# Altium PCB PCB1.PcbDoc
Units mil, origin at the board's own origin, x right, y up, seen from the top; angles counter-clockwise.
Board outline 2870 x 3555 mil, 2 copper layers (Top Layer, Bottom Layer); 34 components, 40 nets, 149 pads, 8 vias.
Unrouted connection lines stored in the file: 1.
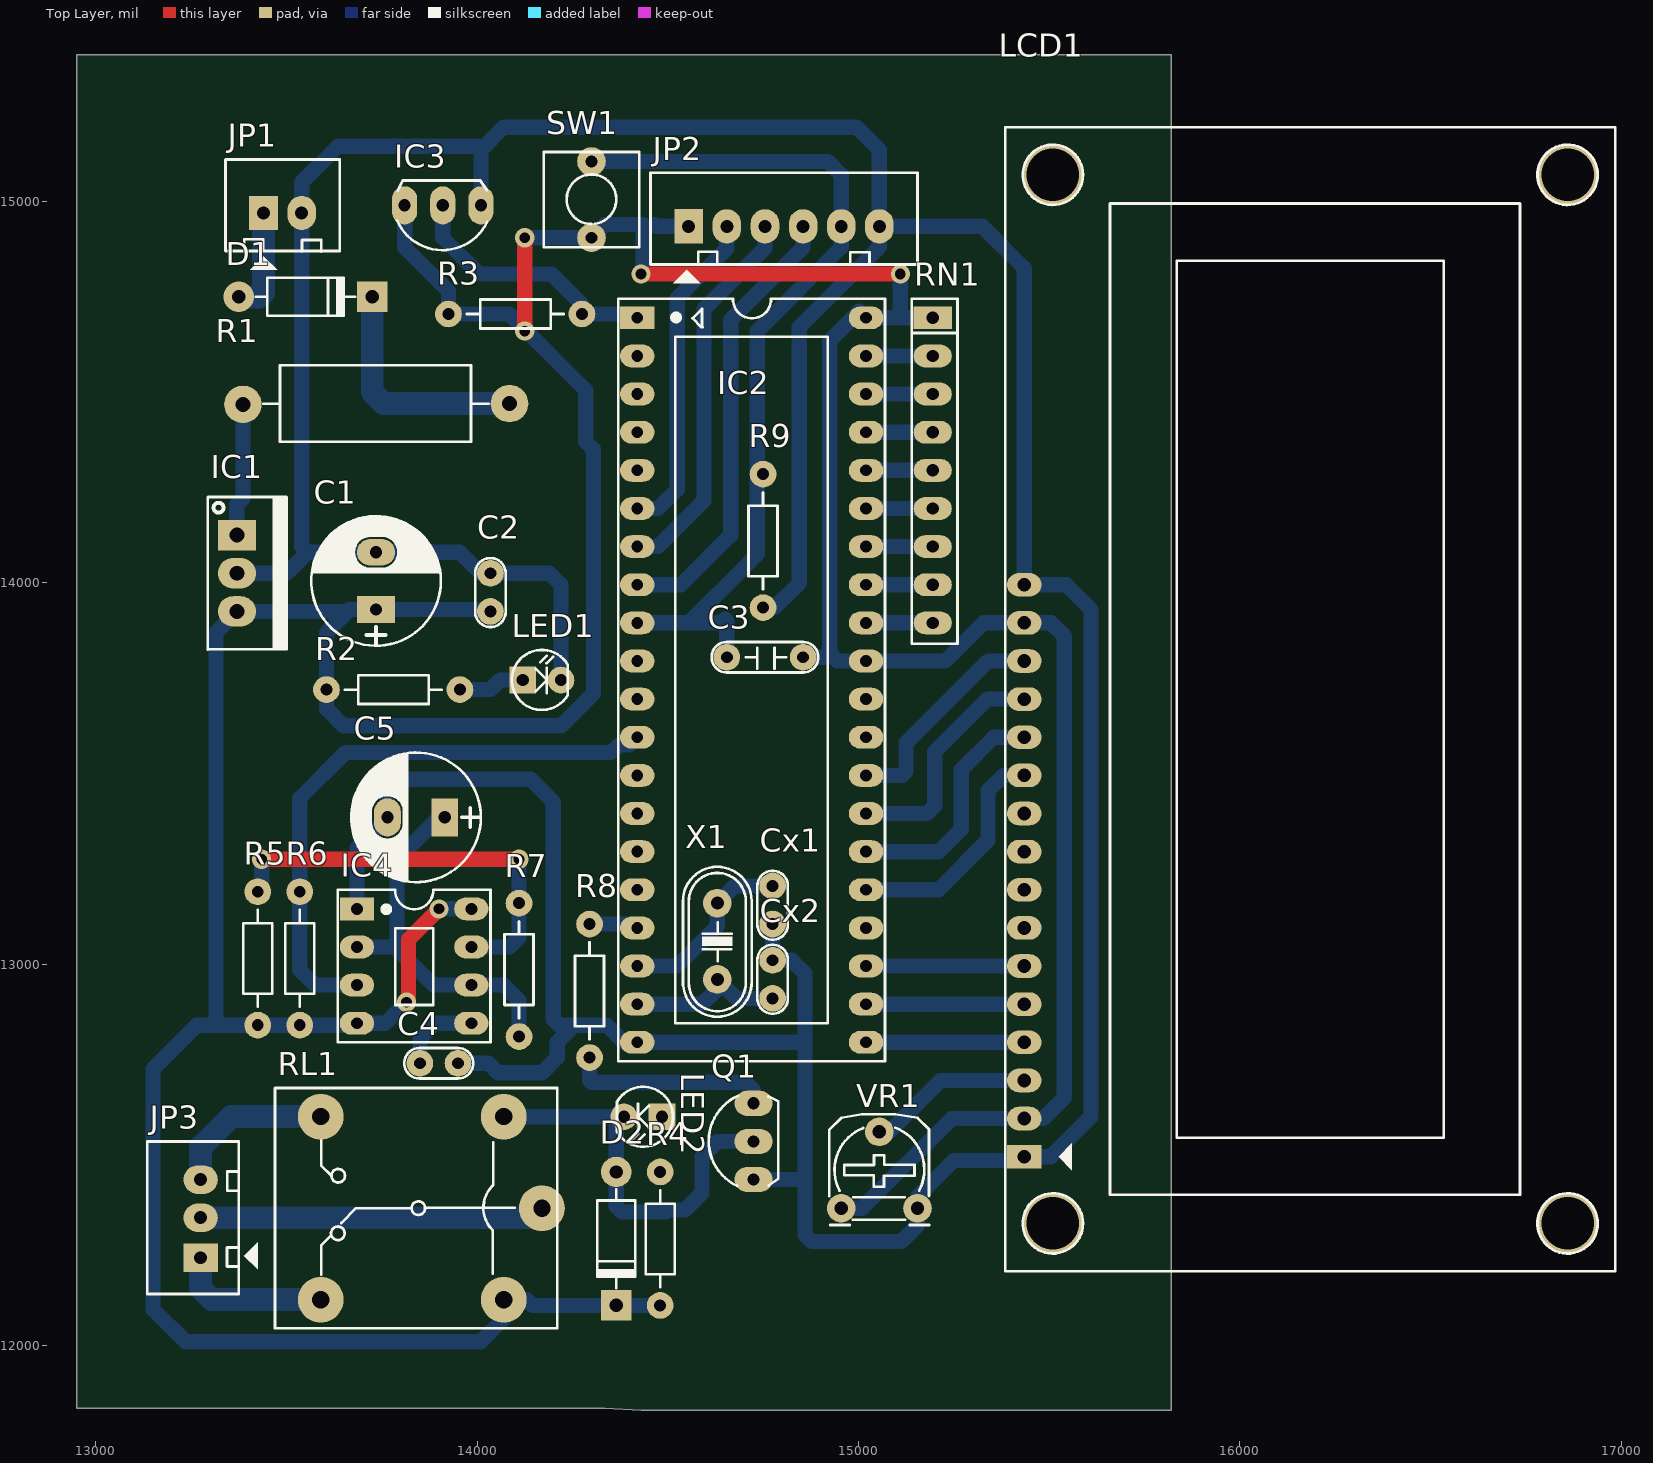
[diagram p0: Top Layer view]
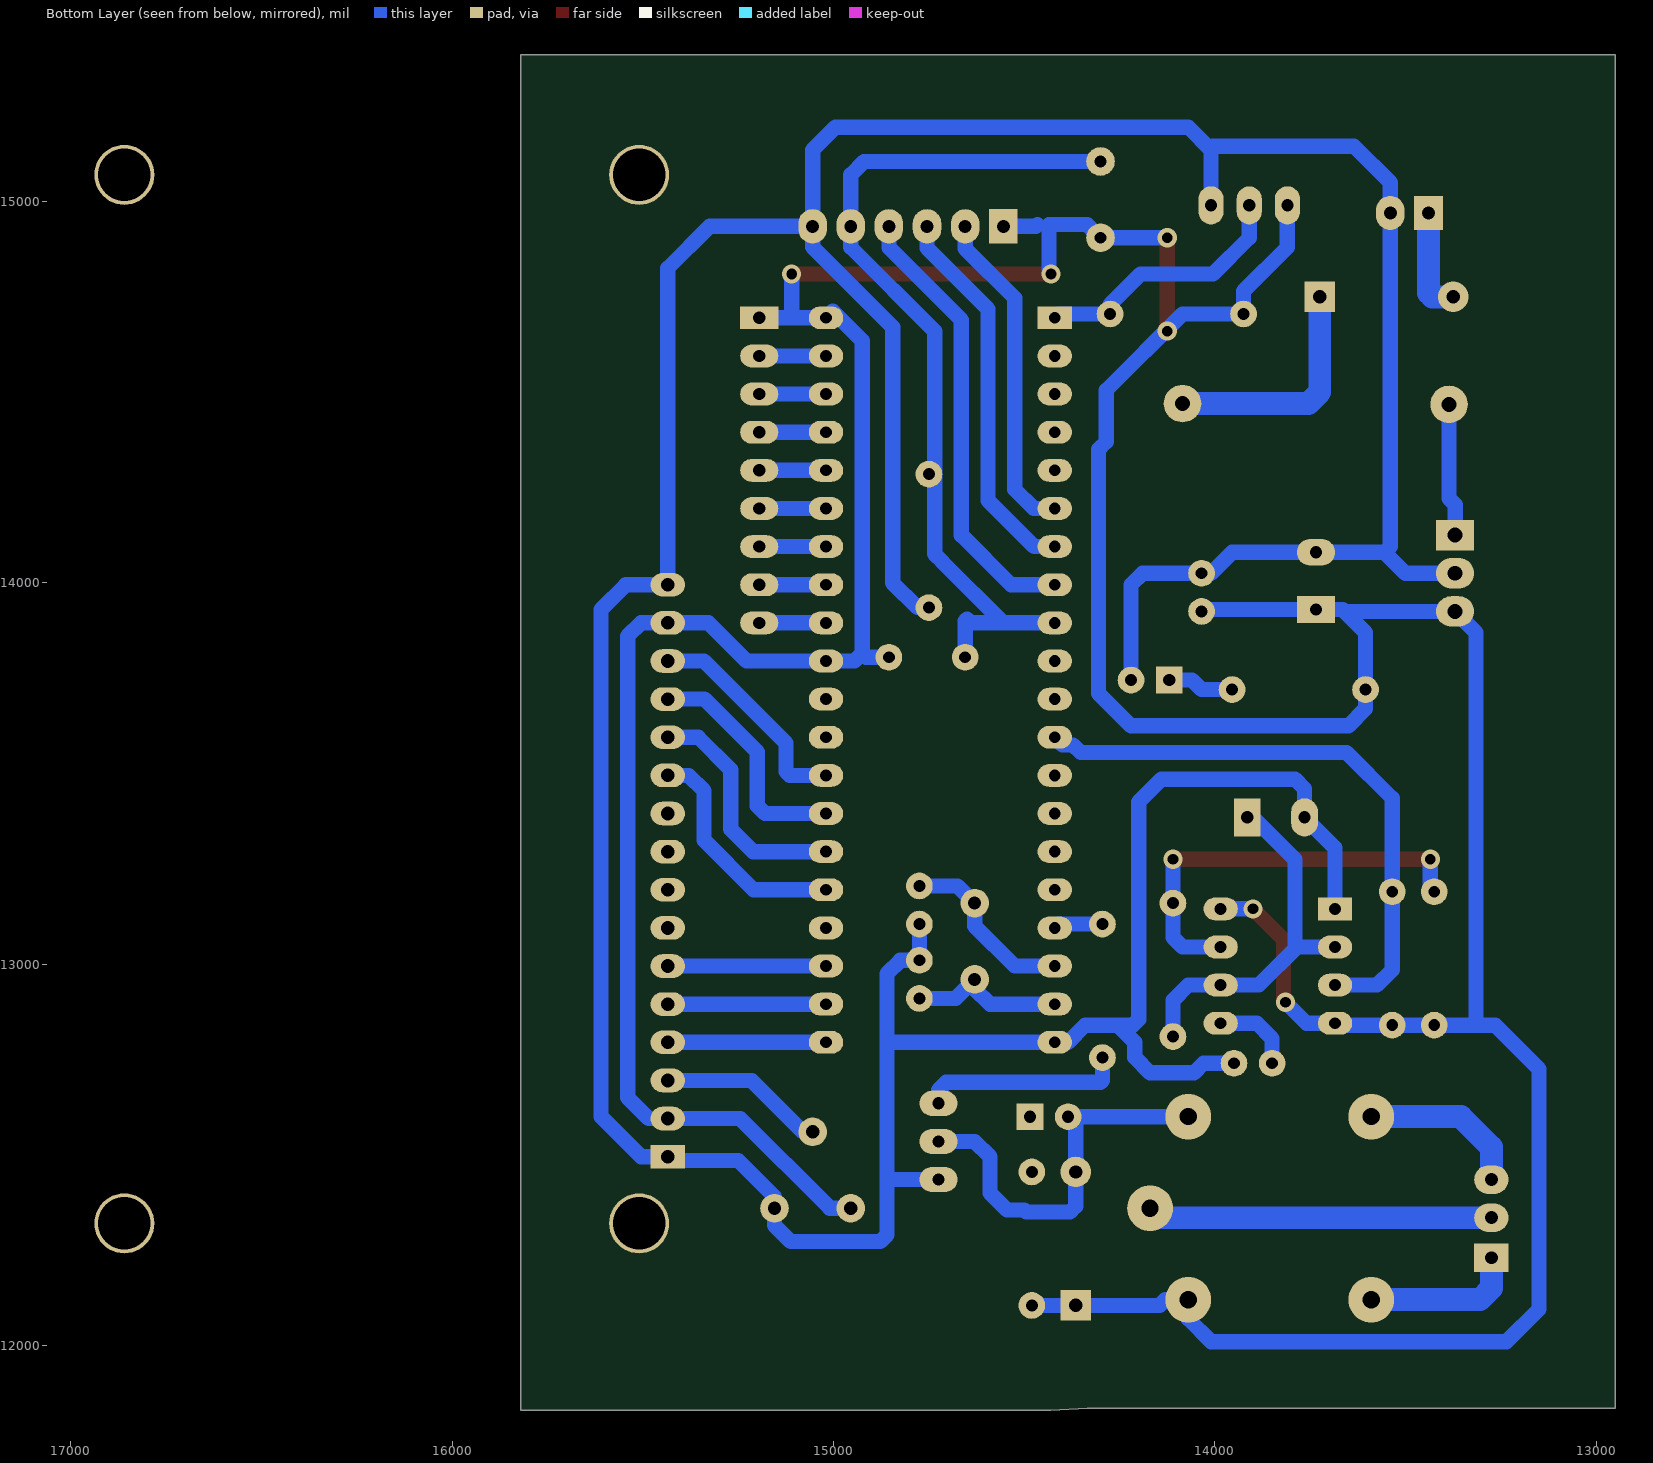
[diagram p1: Bottom Layer view, seen from below]
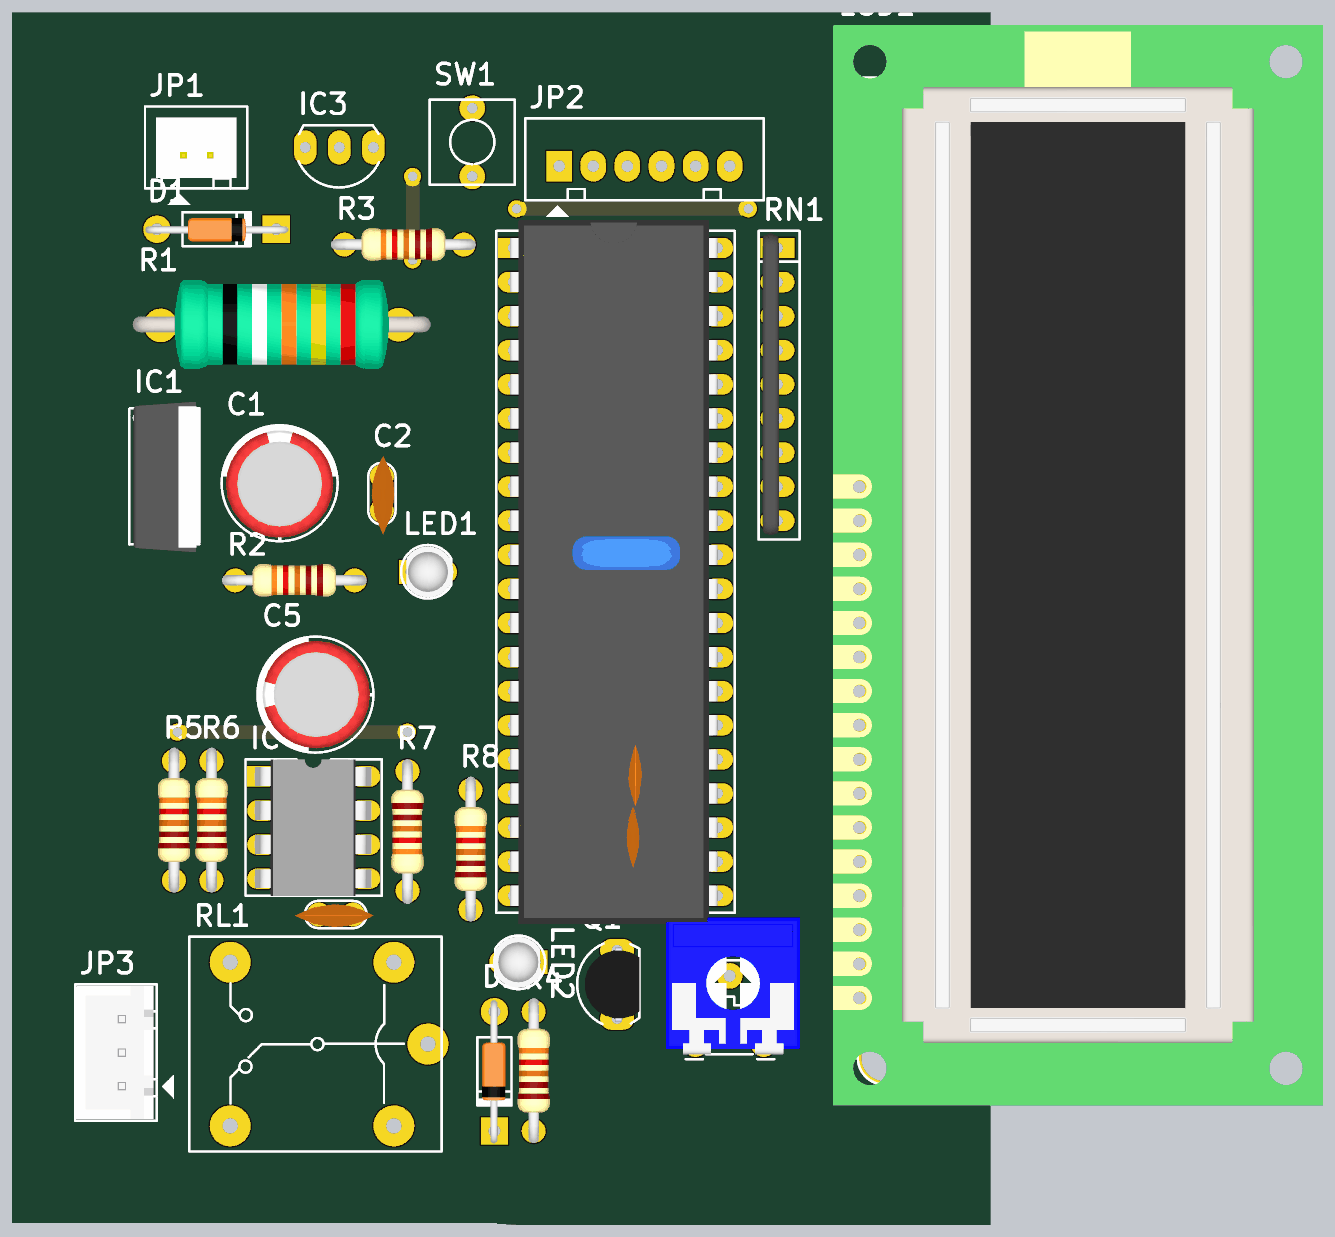
[diagram p2: 3D render of the assembled board from above, using the file's embedded part models]

## Layer stack, top to bottom
Top Solder: solder mask 0.4, Solder Resist, Dk 3.5
Top Layer: signal copper 1.4
Dielectric1: dielectric 12.6, FR-4, Dk 4.8
Bottom Layer: signal copper 1.4
Bottom Solder: solder mask 0.4, Solder Resist, Dk 3.5

## Board outline
14430,11830 15820,11830 15820,14640 15820,15385 14625,15385 12950,15385 12950,12825 12950,11835 14335,11835

## Design rules (kind name [scope] priority, off if disabled: settings)
Clearance [All] p1: gap=30
ComponentClearance [All] p1 off: gap=10 collisioncheckmode=3 verticalgap=10 showdistances=FALSE
MinimumSolderMaskSliver [All] p1 off: minsoldermaskwidth=10
PolygonConnect [All] p1: connectstyle=Relief reliefconductorwidth=10 reliefentries=4 polygonreliefangle="90 Angle" airgapwidth=10
RoutingVias [All] p1: holewidth=28 width=50 viastyle="Through Hole" minholewidth=28 minwidth=50 maxholewidth=28 maxwidth=50
SilkToSilkClearance [All] p1 off: silktosilkclearance=10
SilkToSolderMaskClearance SilkscreenOverComponentPads [IsPad] p1 off: minsilkscreentomaskgap=10 clearancetoexposedcopper=TRUE
SolderMaskExpansion [All] p1: expansion=4
Width [All] p1: maxlimit=60 minlimit=20 preferedwidth=40
26 further rules are at their usual default settings.

## Components (designator, comment, footprint, x,y, rotation, side; value= is the part's Value field where it differs from the comment)
C1 "1000uF" CP1.5/3.4 13735,13930 r90 top
C2 "100pF" CN1 14035,14025 r270 top
C3 "10uF" CN2 14855,13805 r180 top
C4 "104" CN1 13950,12740 r180 top
C5 "HS1101" CP1.5/3.4 13915,13385 r180 top
Cx1 "33pF" CN1 14775,13205 r270 top
Cx2 "33pF" CN1 14775,12910 r90 top
D1 "1N4007" D1A 13375,14750 r180 top
D2 "1N4007" D1A 14365,12455 r90 top
IC1 "LM7805" QTO-220 13370,14125 r270 top
IC2 "AT89C52" DIP40/W0.6 14420,14695 r270 top
IC3 "DS18S20" DS18S20 13910,14990 r180 top
IC4 "LM555" DIP8/W0.3 13685,13145 r270 top
JP1 "JP2" CON2 13440,14970 r0 top
JP2 "JP6" CON6 14555,14935 r0 top
JP3 "JP3" CON3 13275,12235 r90 top
LCD1 "LCD 16x2A" LCD16X2 15435,12495 r90 top
LED1 "LED" LED-3 14120,13745 r0 top
LED2 "LED" LED-3 14485,12600 r180 top
Q1 "C1815" QTO-92 14725,12535 r90 top
R1 "2.2/2W" R2W 14085,14470 r180 top
R2 "330" R1/4W 13605,13720 r0 top
R3 "1k" R1/4W 13925,14705 r0 top
R4 "1k" R1/4W 14480,12455 r270 top
R5 "1k" R1/4W 13425,13190 r270 top
R6 "1k" R1/4W 13535,13190 r270 top
R7 "1k" R1/4W 14110,12810 r90 top
R8 "1k" R1/4W 14295,13105 r270 top
R9 "1k" R1/4W 14750,14285 r270 top
RL1 "Relay 10A/12V" RL_SPDT_10A 14170,12360 r180 top
RN1 "10K" RN8 15195,14695 r270 top
SW1 "SW" SW2 14300,15105 r270 top
VR1 "10K" VR 14955,12360 r0 top
X1 "4Mhz" XT2 14630,13060 r90 top

## Footprints (in the part's own frame and the unit in brackets; to place one, negate y for a bottom-side part, rotate by r counter-clockwise, add the part's x,y. Pads: shape width x height; smd on the part's side, far side on the other; paste and mask are expansions set on the pad)
CN1 [mil]
  round 70 hole 31: 1(0,0) 2(100,0)
  silkscreen extent -40,-40 141,40, body extent -60,-30 170,37, height 265
CN2 [mil]
  round 70 hole 31: 1(0,0) 2(200,0)
  silkscreen extent -40,-40 240,40, body extent -54,-44 260,55, height 407
CON2 [mil] "CON2"
  rect 75x90 hole 34: 1(0,0)
  oval 75x90 hole 34: 2(100,0)
  silkscreen extent -100,-150 200,140, body extent -68,-70 168,107, height 236
CON3 [mil] "CON 3"
  rect 75x90 hole 34: 1(-5,0)
  oval 75x90 hole 34: 2(100,0) 3(200,0)
  silkscreen extent -100,-150 300,140, body extent -95,-90 295,136, height 276
CON6 [mil] "CON6"
  rect 75x90 hole 34: 1(0,0)
  oval 75x90 hole 34: 2(100,0) 3(200,0) 4(300,0) 5(400,0) 6(500,0)
  silkscreen extent -100,-150 600,140
CP1.5/3.4 [mil] "Tu hoa 220->470uF,16V, 470uF/16V,25V"
  rect 70x100 hole 32: 1(0,0)
  oval 70x100 hole 32: 2(150,0)
  silkscreen extent -95,-170 245,170, body extent -85,-157 230,157, height 446
D1A [mil] "Diode 1A, W 100mil, L 350mil"
  round 80 hole 35: 1(0,0)
  rect 80x80 hole 35: 2(-350,0)
  silkscreen extent -305,-50 -45,50, body extent -386,-33 34,36, height 84
DIP8/W0.3 [mil] "8 PIN, W 300mil, Pin to pin 100mil"
  rect 60x90 hole 31: 1(0,0)
  oval 60x90 hole 31: 2(100,0) 3(200,0) 4(300,0) 5(300,300) 6(200,300) 7(100,300) 8(0,300)
  silkscreen extent -50,-50 350,350, body extent -50,-40 350,336, height 201
DIP40/W0.6 [mil] "40 PIN, W 600mil, Pin to pin 100mil"
  rect 60x90 hole 31: 1(0,0)
  oval 60x90 hole 31: 2(100,0) 3(200,0) 4(300,0) 5(400,0) 6(500,0) 7(600,0) 8(700,0) 9(800,0) 10(900,0) 11(1000,0) 12(1100,0) 13(1200,0) 14(1300,0) 15(1400,0) 16(1500,0) 17(1600,0) 18(1700,0) 19(1800,0) 20(1900,0) 21(1900,600) 22(1800,600) 23(1700,600) 24(1600,600) 25(1500,600) 26(1400,600) 27(1300,600) 28(1200,600) 29(1100,600) 30(1000,600) 31(900,600) 32(800,600) 33(700,600) 34(600,600) 35(500,600) 36(400,600) 37(300,600) 38(200,600) 39(100,600) 40(0,600)
  silkscreen extent -50,-50 1950,650, body extent -82,-10 1982,600, height 224
DS18S20 [mil] "TO-92"
  oval 66x100 hole 32: 3(100,0) 4(0,0) 5(-100,0)
  silkscreen extent -117,-65 120,118
LCD16X2 [mil] "LCD dipslay 16x2, 16 pin"
  rect 62x90 hole 36: 1(0,0)
  oval 62x90 hole 36: 2(100,0) 3(200,0) 4(300,0) 5(400,0) 6(500,0) 7(600,0) 8(700,0) 9(800,0) 10(900,0) 11(1000,0) 12(1100,0) 13(1200,0) 14(1300,0) 15(1400,0) 16(1500,0)
  round 157.48 hole 137.8: "Hole 0"(-175,-75) "Hole 0"(-175,-1425) "Hole 0"(2575,-1425) "Hole 0"(2575,-75)
  silkscreen extent -300,-1550 2700,50, body extent -315,-1360 2855,77, height 414
LED-3 [mil] "LED 2 PIN, 3ly Only colour"
  rect 70x70 hole 32: 1(0,0)
  round 70 hole 32: 2(100,0)
  silkscreen extent -29,-78 118,79, body extent -13,-75 125,75, height 217
QTO-92 [mil] "TO-92"
  oval 66x100 hole 32: 1(-100,0) 2(0,0) 3(100,0)
  silkscreen extent -117,-65 120,118, body extent -109,-66 109,95, height 245
QTO-220 [mil] "TO-220 - 1-2-3"
  rect 80x100 hole 39: 1(0,0)
  oval 80x100 hole 39: 2(100,0) 3(200,0)
  silkscreen extent -100,-76 300,130, body extent -119,-64 322,121, height 755
R1/4W [mil] "R 1/4W, 2 Pin, 350mil"
  round 70 hole 31: 1(0,0) 2(350,0)
  silkscreen extent 48,-38 302,38, body extent -40,-47 386,47, height 111
R2W [mm] "R2W, 2 pin, 700mil"
  round 2.5 hole 1: 1(0,0) 2(17.755,0.051)
  silkscreen extent 1.37,-2.57 16.38,2.54, body extent -2.36,-3.33 19.84,3.27, height 8.3
RL_SPDT_10A [mil] "Relay SPDT, 5 pin, 10A,W 650mil, L 800mil, H 800mil"
  round 120 hole 45: 1(0,0) 2(580,240) 3(580,-240) 4(100,-240) 5(100,240)
  silkscreen extent -40,-315 700,315
RN8 [mil] "R SIP8, 9 Pin"
  rect 60x100 hole 32: 1(0,0)
  oval 60x100 hole 32: 2(100,0) 3(200,0) 4(300,0) 5(400,0) 6(500,0) 7(600,0) 8(700,0) 9(800,0)
  silkscreen extent -50,-55 855,65, body extent -43,-44 843,5, height 259
SW2 [mil] "SW button 2pin, 250x 250 mil"
  round 75 hole 31: 1(0,0) 2(200,0)
  silkscreen extent -25,-125 225,125
VR [mil] "Resistor Variable"
  round 75 hole 35: 1(0,0) 2(100,200) 3(200,0)
  silkscreen extent -31,-44 231,246, body extent -87,-30 307,372, height 165
XT2 [mil] "Footpin for Crystal 2 pin"
  round 75 hole 34: 1(-100,0) 2(100,0)
  silkscreen extent -198,-90 195,90, body extent -233,-93 213,90, height 138

## Part data
C1 C5: library part CP4, "Cap 1000uF/16V - 220uF/50V"
C2 C3 C4: library part CN1, "Cap np  1pF - 472pF"
Cx1 Cx2: library part CN0, "Cremic For Xtal 1pF => 100pF"
D1 D2: library part D1A, "Diode 1A"
IC1: library part LM78xx, "On ap +, from + 5 to + 24VDC"
IC2: "Atmel AT89C52, 8k Byte Flash Memory , 40 Pin"
IC3: "High Precision  1-Wire® Digital Thermometer"
IC4: "Timer"
JP1: library part Con2, "Connector 2"
JP2: library part Con6, "Connector 6"
JP3: library part Con3, "Connector 3"
LCD1: library part LCD16x2A, "LCD dipslay 16 char, 2 line"
LED1 LED2: "LED Single colour Green and Red"
Q1: "NPN 600mW, ECB"
R1: library part R2W, "Resistor 2W"
R2 R3 R4 R5 R6 R7 R8 R9: library part R1/4W, "Resistor 1/4W"
RL1: library part "Relay 1", "Relay SPDT,10A - 12VDC 5 Pin"
RN1: library part RN8, "Resistor 8 (Thanh)"
SW1: library part SW2, "Switch button 2 pin"
VR1: library part VR, "Var Resistor"
X1: library part XT2, "Crystal For all Crystal 2pin."

## Via types
v1: diameter 50, hole 28, Top Layer to Bottom Layer, 8 vias

## Nets (pads, with @x,y where several pads share a name; then routed paths per layer and width w, separated by ;. In a path a pad name is that pad's centre, name@x,y a point inside that pad or via, vN(x,y) a via of type N, cw(c..) or ccw(c..) an arc to the next point about the centre after c; other vN are vias at no path point)
D4: IC2.25 LCD1.11 | length 615.4
  Bottom Layer w40: IC2.25 15210,13195 15340,13325 15340,13455 15380,13495 LCD1.11
D5: IC2.26 LCD1.12 | length 630.6
  Bottom Layer w40: IC2.26 15211.01,13295 15270,13353.99 15270,13510 15355,13595 LCD1.12
D6: IC2.27 LCD1.13 | length 621.9
  Bottom Layer w40: IC2.27 15180,13395 15200,13415 15200,13556.01 15338.99,13695 LCD1.13
D7: IC2.28 LCD1.14 | length 583.2
  Bottom Layer w40: IC2.28 15115,13495 15125,13505 15125,13580 15340,13795 LCD1.14
EN: IC2.23 LCD1.6 | length 415
  Bottom Layer w40: IC2.23 LCD1.6
GND: C1.2 C2.1 C4.1 C5.2 Cx1.2 Cx2.2 IC1.2 IC2.20 IC3.5 IC4.1 JP1.2 JP2.6 LCD1.1 LCD1.16 LED1.2 Q1.1 R9.2 VR1.3 | length 12451
  Bottom Layer w40: IC1.2 13500,14025 13555,14080 ; IC4.1 13685,13305 C5.2 13765,13460 13790,13485 14140,13485 14200,13425 14200,12855 14215,12840 14255,12840 ; C4.1 14030,12740 14055,12715 14170,12715 14210,12755 14210,12795 14255,12840 ; IC3.5 14010,15140 14005,15145 13635,15145 13540,15050 JP1.2 13540,14095 13555,14080 ; 14010,15135 14070,15195 14995,15195 15055,15135 JP2.6 ; LED1.2 14220,13995 14190,14025 14045,14025 14035,14035 C2.1 14010,14025 13955,14080 C1.2 13555,14080 ; Q1.1 14860,12435 ; R9.2 14780,13935 14845,14000 14845,14671.01 15055,14881.01 JP2.6 ; Cx1.2 Cx2.2 14825,13010 14860,12975 14860,12795 ; 14255,12840 14340,12840 14385,12795 IC2.20 14860,12795 ; 14860,12795 14860,12290 14877.5,12272.5 15112.5,12272.5 15155,12315 VR1.3 15155,12390 15250,12485 15425,12485 LCD1.1 15505,12495 15610,12600 15610,13930 15545,13995 LCD1.16 15435,14825 15325,14935 JP2.6
HVCC: D1.1 JP1.1 | length 279.1
  Bottom Layer w60: D1.1 13430,14750 13440,14760 JP1.1
MISO: IC2.7 JP2.3 | length 1010.4
  Bottom Layer w40: IC2.7 14473.99,14095 14595,14216.01 14595,14717.99 14755,14877.99 JP2.3
MOSI: IC2.6 JP2.2 | length 869.6
  Bottom Layer w40: IC2.6 14475,14195 14525,14245 14525,14746.98 14655,14876.98 JP2.2
NetC4_2: C4.2 IC4.5 | length 216.6
  Bottom Layer w40: C4.2 13850,12805 13890,12845 IC4.5
NetC5_1: C5.1 IC4.2 IC4.6 R7.1 | length 980.7
  Bottom Layer w40: IC4.2 13785,13045 ; C5.1 13900,13385 13850,13335 13850,13334.79 13800.21,13285 13800,13285 13790,13275 13790,13050 13785,13045 ; R7.1 14110,12905 14070,12945 IC4.6 13885,12945 13785,13045
NetCx1_1: Cx1.1 IC2.18 X1.2 | length 477.1
  Bottom Layer w40: IC2.18 14525,12995 14630,13100 X1.2 14675,13205 Cx1.1
NetCx2_1: Cx2.1 IC2.19 X1.1 | length 417.3
  Bottom Layer w40: IC2.19 14590,12895 14630,12935 X1.1 14680,12910 Cx2.1
NetD1_2: D1.2 R1.1 | length 622.4
  Bottom Layer w60: D1.2 13725,14500 13755,14470 R1.1
NetD2_1: D2.1 LED2.2 Q1.2 RL1.4 | length 1056.8
  Bottom Layer w40: RL1.4 LED2.2 14365,12580 D2.1 14365,12365 14380,12350 14495,12350 14500,12355 14545,12355 14590,12400 14590,12495 14630,12535 Q1.2
NetIC1_1: IC1.1 R1.2 | length 349.6
  Bottom Layer w40: IC1.1 13370,14205 13386,14221 R1.2
NetIC2_1: IC2.1 IC3.4 R3.2 | length 696.6
  Bottom Layer w40: IC3.4 13910,14905 14005,14810 14195,14810 14275,14730 R3.2 14410,14705 IC2.1
NetIC2_12: IC2.12 IC4.3 R6.1 | length 1567.8
  Bottom Layer w40: IC4.3 13575,12945 13535,12985 R6.1 13535,13435 13655,13555 14351.86,13555 14371.86,13575 14400,13575 IC2.12
NetIC2_32: IC2.32 RN1.9 | length 175
  Bottom Layer w40: IC2.32 RN1.9
NetIC2_33: IC2.33 RN1.8 | length 175
  Bottom Layer w40: IC2.33 RN1.8
NetIC2_34: IC2.34 RN1.7 | length 175
  Bottom Layer w40: IC2.34 RN1.7
NetIC2_35: IC2.35 RN1.6 | length 175
  Bottom Layer w40: IC2.35 RN1.6
NetIC2_36: IC2.36 RN1.5 | length 175
  Bottom Layer w40: IC2.36 RN1.5
NetIC2_37: IC2.37 RN1.4 | length 175
  Bottom Layer w40: IC2.37 RN1.4
NetIC2_38: IC2.38 RN1.3 | length 175
  Bottom Layer w40: IC2.38 RN1.3
NetIC2_39: IC2.39 RN1.2 | length 175
  Bottom Layer w40: IC2.39 RN1.2
NetIC4_7: IC4.7 R5.1 R7.2 | length 1104.5
  Top Layer w40: v1(13435,13275) v1(14110,13275)
  Bottom Layer w40: R5.1 13435,13200 v1(13435,13275) ; IC4.7 14085,13045 14110,13070 R7.2 v1(14110,13275)
NetJP3_1: JP3.1 RL1.2 | length 407.4
  Bottom Layer w60: JP3.1 13275,12150 13305,12120 RL1.2
NetJP3_2: JP3.2 RL1.1 | length 905.4
  Bottom Layer w60: JP3.2 14145,12335 RL1.1
NetJP3_3: JP3.3 RL1.3 | length 433.1
  Bottom Layer w60: JP3.3 13275,12520 13355,12600 RL1.3
NetLCD1_3: LCD1.3 VR1.2 | length 435.9
  Bottom Layer w40: VR1.2 15080,12560 15215,12695 LCD1.3
NetLED1_1: LED1.1 R2.2 | length 175.4
  Bottom Layer w40: R2.2 14035,13720 14060,13745 LED1.1
NetLED2_1: LED2.1 R4.1
NetQ1_3: Q1.3 R8.2 | length 535.4
  Bottom Layer w40: R8.2 14295,12695 14300,12690 14705,12690 14725,12670 Q1.3
RESET: C3.2 IC2.9 JP2.5 R9.1 SW1.1 | length 2346.4
  Bottom Layer w40: SW1.1 14920,15105 14955,15070 JP2.5 14955,14880 14735,14660 14735,14076.01 14715,14056.01 14715,14055 14555,13895 ; IC2.9 14555,13895 ; C3.2 14655,13900 14650,13905 14640,13895 14555,13895
ROLE1: IC2.17 R8.1 | length 129.1
  Bottom Layer w40: R8.1 14410,13105 IC2.17
RS: IC2.21 LCD1.4 | length 415
  Bottom Layer w40: IC2.21 LCD1.4
RW: IC2.22 LCD1.5 | length 415
  Bottom Layer w40: IC2.22 LCD1.5
SCK: IC2.8 JP2.4 | length 1187.5
  Bottom Layer w40: IC2.8 14535,13995 14665,14125 14665,14688.99 14855,14878.99 JP2.4
VCC: C1.1 C2.2 C3.1 D2.2 IC1.3 IC2.31 IC2.40 IC3.3 IC4.4 IC4.8 JP2.1 LCD1.2 LCD1.15 R2.1 R3.1 R4.2 R5.2 R6.2 RL1.5 RN1.1 SW1.2 VR1.1 | length 12928.1
  Top Layer w40: v1(13815,12900) 13820,12905 13820,13065 v1(13900,13145) ; v1(14125,14660) v1(14125,14905) ; v1(14430,14810) v1(15110,14810)
  Bottom Layer w40: IC3.3 13810,14880 13925,14765 R3.1 14085,14705 14285,14505 14285,14370 14305,14350 14305,13709.79 14220.21,13625 13650,13625 13605,13670 R2.1 13605,13870 13660,13925 ; v1(13815,12900) 13760,12845 IC4.4 13680,12840 R6.2 R5.2 13315,12840 ; v1(13900,13145) IC4.8 ; C2.2 14030,13930 C1.1 13665,13930 13660,13925 ; v1(14125,14905) SW1.2 14335,14940 14435,14940 14435,14815 v1(14430,14810) ; 14465,14940 14470,14935 JP2.1 ; R4.2 D2.2 14145,12105 14130,12120 RL1.5 14070,12070 14010,12010 13235,12010 13150,12095 13150,12725 13265,12840 13315,12840 ; C3.1 14915,13805 14925,13815 ; VR1.1 15010,12360 15245,12595 LCD1.2 15485,12595 15540,12650 15540,13860 15505,13895 LCD1.15 15328.14,13895 15228.14,13795 IC2.31 14945,13795 14925,13815 ; IC2.40@15002.5,14712.5 14925,14635 14925,13815 ; IC2.40 15110,14695 ; v1(15110,14810) 15110,14695 ; RN1.1 15110,14695 ; 13315,12840 13315,13870 IC1.3 13660,13925
pads on no net: "LCD1.Hole 0" IC2.2 IC2.3 IC2.4 IC2.5 IC2.10 IC2.11 IC2.13 IC2.14 IC2.15 IC2.16 IC2.24 IC2.29 IC2.30 LCD1.7 LCD1.8 LCD1.9 LCD1.10